# Altium PCB Nano_1.PcbDoc
Units mil, origin at the board's own origin, x right, y up, seen from the top; angles counter-clockwise.
Board outline 3887.5 x 2125 mil, 2 copper layers (Top Layer, Bottom Layer); 52 components, 35 nets, 149 pads, 2 vias.
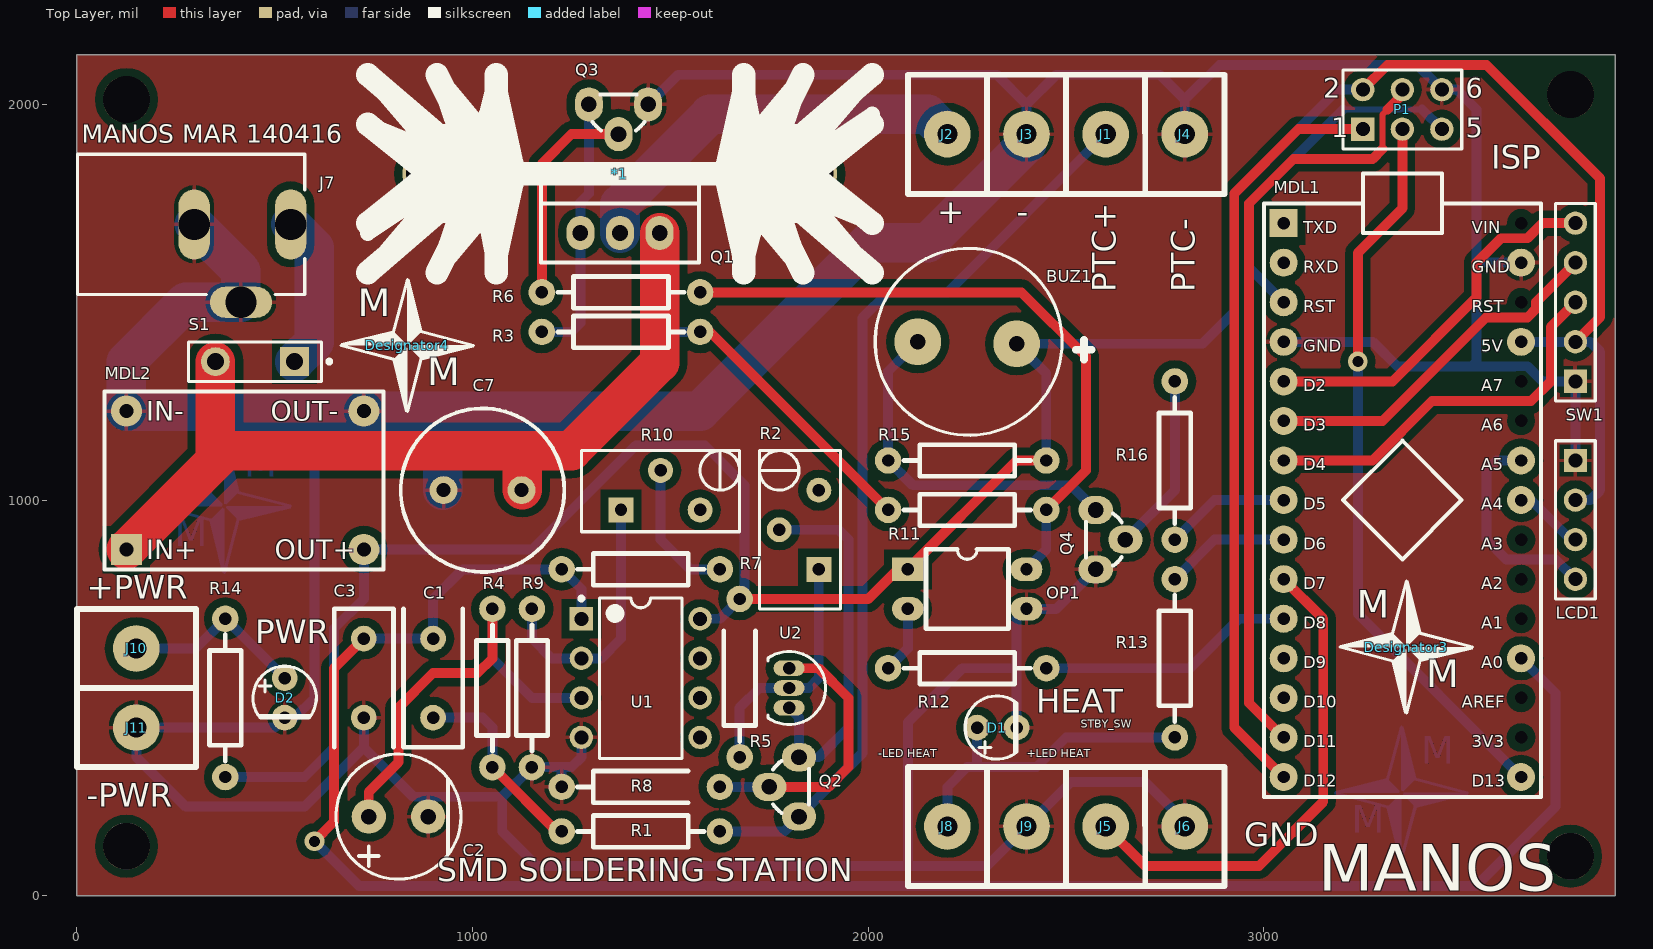
[diagram p0: Top Layer view]
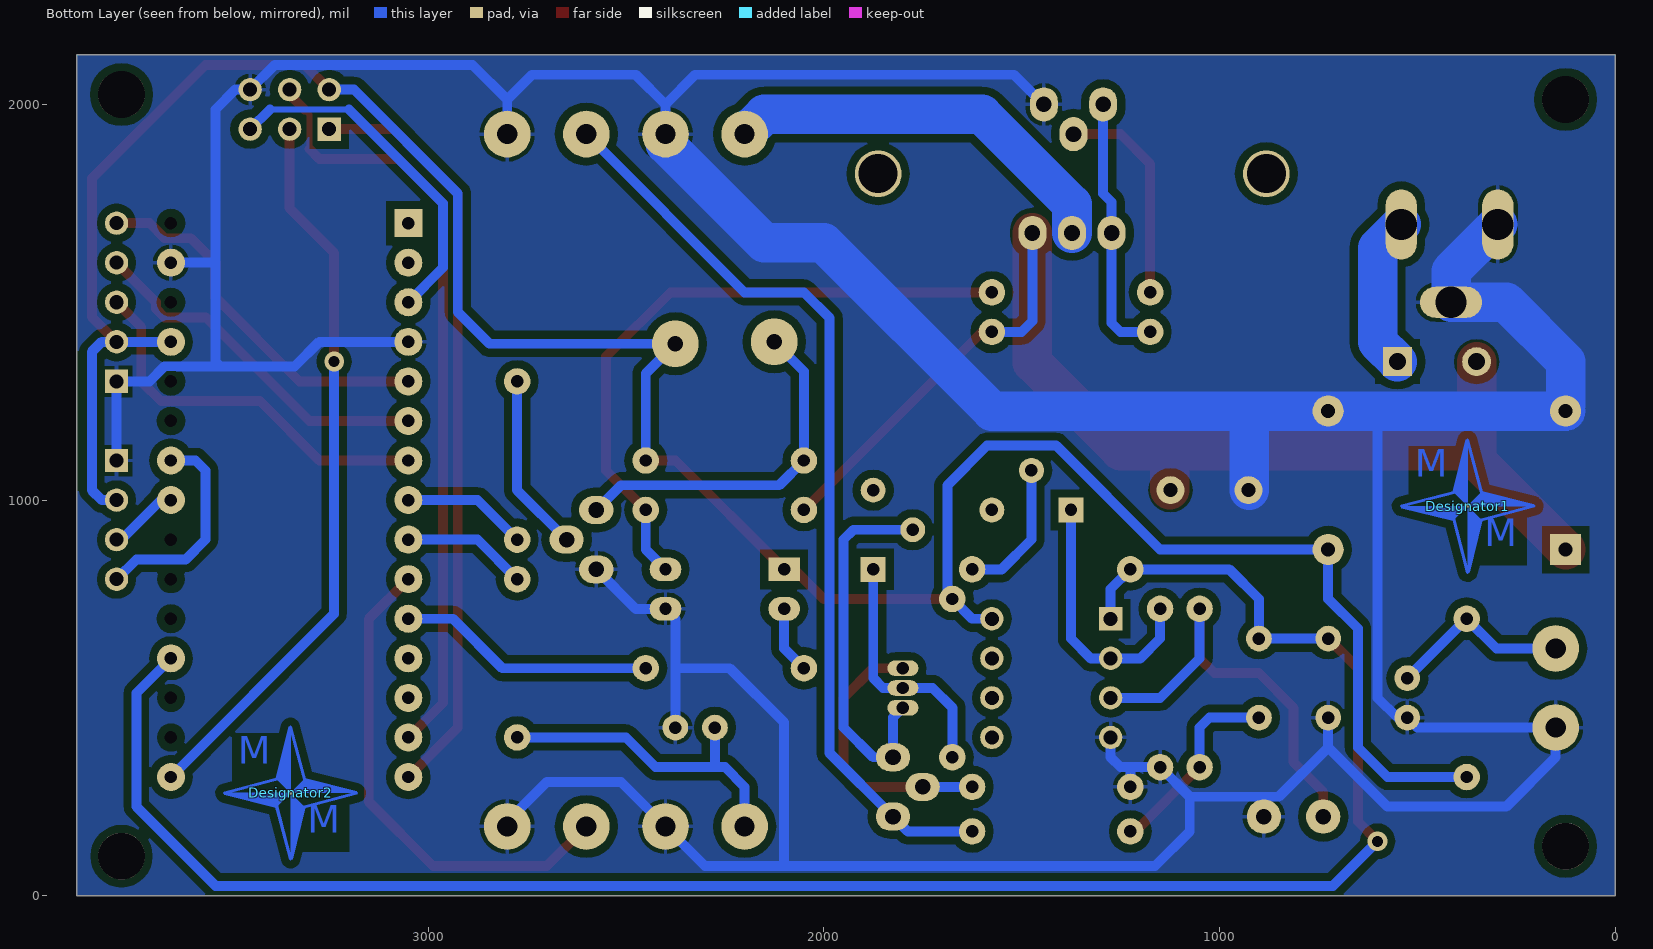
[diagram p1: Bottom Layer view, seen from below]

## Layer stack, top to bottom
Top Solder: solder mask 0.4, Solder Resist, Dk 3.5
Top Layer: signal copper 1.4
Dielectric 1: dielectric 12.6, FR-4, Dk 4.8
Bottom Layer: signal copper 1.4
Bottom Solder: solder mask 0.4, Solder Resist, Dk 3.5

## Board outline
0,0 3887.5,0 3887.5,2125 0,2125

## Design rules (kind name [scope] priority, off if disabled: settings)
Clearance [All] p1: gap=10
ComponentClearance [All] p1 off: gap=10 collisioncheckmode=3 verticalgap=10 showdistances=FALSE
PolygonConnect [All] p1: connectstyle=Relief reliefconductorwidth=10 reliefentries=4 polygonreliefangle="90 Angle" airgapwidth=10
RoutingVias [All] p1: holewidth=28 width=50 viastyle="Through Hole" minholewidth=28 minwidth=50 maxholewidth=28 maxwidth=50
SolderMaskExpansion [All] p1: expansion=4
UnpouredPolygon [All] p1: allowunpoured=FALSE
Width [All] p1: maxlimit=500 minlimit=10 preferedwidth=25 minimp=50.000000 maximp=50.000000 favimp=50.000000
28 further rules are at their usual default settings.

## Classes and differential pairs
component class Nano_1: *1 BUZ1 C1 C2 C3 C7 D1 D2 J1 J2 J3 J4 J5 J6 J7 J8 J9 J10 J11 LCD1 MDL1 MDL2 OP1 P1 Q1 Q2 Q3 Q4 R1 R2 R3 R4 R5 R6 R7 R8 R9 R10 R11 R12 R13 R14 R15 R16 S1 SW1 U1 U2

## Components (designator, comment, footprint, x,y, rotation, side; value= is the part's Value field where it differs from the comment)
*1 "HEAT-S1" "SK 104 HEATSHINK" 1360,1825 r180 top
BUZ1 "BUZZER" BUZZER 2125,1400 r0 top
C1 "47nF" RAD0.2 900,650 r270 top
C2 "10uF/25V" RB-08 737.5,200 r180 top
C3 "10nF" RAD0.2 725,450 r90 top
C7 "2200uF/35V" RB5-10.5 1025,1025 r180 top
D1 "HEAT" LED0.3 2325,425 r180 top
D2 "PWR" LED0.3 525,500 r90 top
Designator1 "Comment" LOGO_Bottom_Layer 372.59,984.65 r0 top
Designator2 "Comment" LOGO_Bottom_Layer 3347.59,259.65 r0 top
Designator3 "Comment" LOGO_Top_Overlay 3360.09,628.4 r0 top
Designator4 "Comment" LOGO_Top_Overlay 835.09,1390.9 r0 top
J1 "PTC+" CON2 2600,1925 r0 top
J2 "+" CON2 2200,1925 r0 top
J3 "-" CON2 2400,1925 r0 top
J4 "PTC-" CON2 2800,1925 r0 top
J5 "STBY_SW" CON2 2600,175 r0 top
J6 "GND" CON2 2800,175 r0 top
J7 "PWR2.5" "POWER JACK" 375,1500 r0 top
J8 "-LED HEAT" CON2 2200,175 r0 top
J9 "+LED HEAT" CON2 2400,175 r0 top
J10 "+PWR" CON2 150,625 r90 top
J11 "-PWR" CON2 150,425 r90 top
LCD1 "LCD 4x20 SERIAL" HDR1X4 3787.5,1100 r270 top
MDL1 "ARDUINO NANO" "ARDUINO NANO" 3050,300 r0 top
MDL2 "STEP DOWN CONVERTER" "STEP DOWN CONVERTER MINI" 125,1225 r0 top
OP1 "PC814" DIP-4 2250,775 r270 top
P1 "ISP" HDR2X3 3250,1937.5 r0 top
Q1 "IRF9530" TO-220V 1272.5,1675 r0 top
Q2 "BC557" T0-92 1750,275 r270 top
Q3 "BS170" T0-92 1368.75,1925 r0 top
Q4 "BC547" T0-92 2650,900 r90 top
R1 "10K" AXIAL0.4 1425,162.5 r180 top
R2 "5K" VR6 1875,925 r90 top
R3 "10K" AXIAL0.4 1375,1425 r0 top
R4 "15K" AXIAL0.4 1050,525 r90 top
R5 "1K" AXIAL0.4 1675,550 r90 top
R6 "220R" AXIAL0.4 1375,1525 r180 top
R7 "220K" AXIAL0.4 1425,825 r0 top
R8 "120K" AXIAL0.4 1425,275 r0 top
R9 "10K" AXIAL0.4 1150,525 r270 top
R10 "100K" VR6 1475,975 r0 top
R11 "2K2" AXIAL0.4 2250,975 r0 top
R12 "330R" AXIAL0.4 2250,575 r0 top
R13 "1K" AXIAL0.4 2775,600 r270 top
R14 "1K" AXIAL0.4 375,500 r270 top
R15 "1K" AXIAL0.4 2250,1100 r0 top
R16 "4K7" AXIAL0.4 2775,1100 r90 top
S1 "SW-SPST" SPST-2 450,1350 r180 top
SW1 "ENCODER" HDR1X5 3787.5,1300 r90 top
U1 "LT1013" DIP-8 1425,550 r0 top
U2 "LM336" Z03A 1800,525 r180 top

## Footprints (in the part's own frame and the unit in brackets; to place one, negate y for a bottom-side part, rotate by r counter-clockwise, add the part's x,y. Pads: shape width x height; smd on the part's side, far side on the other; paste and mask are expansions set on the pad)
"ARDUINO NANO" [mm]
  rect 1.8x1.8 hole 0.8: 1(0,35.56)
  round 1.8 hole 0.8: 2(0,33.02) 3(0,30.48) 4(0,27.94) 5(0,25.4) 6(0,22.86) 7(0,20.32) 8(0,17.78) 9(0,15.24) 10(0,12.7) 11(0,10.16) 12(0,7.62) 13(0,5.08) 14(0,2.54) 15(0,0) 16(15.24,0) 19(15.24,7.62) 23(15.24,17.78) 24(15.24,20.32) 27(15.24,27.94) 29(15.24,33.02)
  round 0 hole 0.8: 17(15.24,2.54) 18(15.24,5.08) 20(15.24,10.16) 21(15.24,12.7) 22(15.24,15.24) 25(15.24,22.86) 26(15.24,25.4) 28(15.24,30.48) 30(15.24,35.56)
  silkscreen extent -1.27,-1.27 16.51,38.73
AXIAL0.4 [mm]
  round 1.7 hole 0.8: 1(-5.08,0) 2(5.08,0)
  silkscreen extent -4.06,-1.02 4.06,1.02
BUZZER [mm]
  round 3 hole 1: 1(6.35,-0.127) 2(0,0)
  silkscreen extent -2.73,-6 11.18,6
CON2 [mm]
  round 3 hole 1.3: 1(0,0)
  silkscreen extent -2.54,-3.83 2.54,3.81
DIP-4 [mil]
  rect 60x80 hole 31.5: 1(-50,-150)
  oval 60x80 hole 31.5: 2(50,-150) 3(50,150) 4(-50,150)
  silkscreen extent -100,-104 100,104
DIP-8 [mm] "DIP; 8 Leads; Row Spacing 7.62 mm; Pitch 2.54 mm"
  rect 1.5x1.5 hole 0.9: 1(-3.81,3.81)
  round 1.5 hole 0.9: 2(-3.81,1.27) 3(-3.81,-1.27) 4(-3.81,-3.81) 5(3.81,-3.81) 6(3.81,-1.27) 7(3.81,1.27) 8(3.81,3.81)
  silkscreen extent -3.93,-5.15 2.65,5.23
HDR1X4 [mm] "Connector; Header; 4 Position"
  rect 1.5x1.5 hole 0.9: 1(0,0)
  round 1.5 hole 0.9: 2(2.54,0) 3(5.08,0) 4(7.62,0)
  silkscreen extent -1.27,-1.27 8.89,1.27
HDR1X5 [mm] "Connector; Header; 5 Position"
  rect 1.5x1.5 hole 0.9: 1(0,0)
  round 1.5 hole 0.9: 2(2.54,0) 3(5.08,0) 4(7.62,0) 5(10.16,0)
  silkscreen extent -1.27,-1.27 11.43,1.27
HDR2X3 [mm] "Connector; Header; 3x2 Position"
  rect 1.5x1.5 hole 0.9: 1(0,0)
  round 1.5 hole 0.9: 2(0,2.54) 3(2.54,0) 4(2.54,2.54) 5(5.08,0) 6(5.08,2.54)
  silkscreen extent -1.27,-1.27 6.35,3.81
LED0.3 [mil] "LED 3MM"
  round 65 hole 31.5: 1(50,0) 2(-50,0)
  silkscreen extent -51,-80 80,80
LOGO_Bottom_Layer [mm]
  rect 0.2x0.2 smd far side: 0(0,0)
  Bottom Layer region: -0.953,0.953 -0.117,0.117 -0.166,0 -4.243,0 -4.258,0.126
  Bottom Layer region: 0.953,-0.953 0.117,-0.117 0.166,0 4.243,0 4.258,-0.126
  Bottom Layer region: -0.953,-0.953 -0.117,-0.117 0,-0.166 0,-4.243 -0.126,-4.258
  Bottom Layer region: 0.953,0.953 0.117,0.117 0,0.166 0,4.243 0.126,4.258
  Bottom Layer lines w0.2: -4.243,0 -0.635,-0.953 ; -0.953,0.635 0,4.243 ; 0,-4.243 0.953,-0.635 ; 0.635,0.953 4.243,0
LOGO_Top_Overlay [mm]
  rect 0.2x0.2 on Top Overlay: 0(0,0)
  silkscreen extent -4.26,-4.26 4.26,4.26
"POWER JACK" [mm]
  oval 2x4.5 hole 2: 1(4.2,5) 2(-2,5)
  oval 4x2 hole 2: 3(1,0)
  silkscreen extent -9.5,0.5 5.1,9.5
RAD0.2 [mil]
  round 65 hole 31.5: 1(0,0) 2(200,0)
  silkscreen extent -75,-75 275,75
RB5-10.5 [mm] "Capacitor (Radial); 2 Leads"
  round 1.8 hole 0.9: 1(-2.5,0) 2(2.5,0)
  silkscreen extent -5.25,-5.25 5.25,5.25
RB-08 [mm]
  round 2.2 hole 1: 1(0,0) 2(-3.81,0)
  silkscreen extent -5.92,-4.02 2.11,4.02
"SK 104 HEATSHINK" [mm]
  round 3 hole 2.5: 0(-12.763,0) 0(12.16,0)
  silkscreen extent -16.51,-6.35 15.88,6.35
SPST-2 [mm] "Switch; 2 Leads"
  rect 1.85x1.85 hole 1.1: 1(-2.54,0)
  round 1.85 hole 1.1: 2(2.54,0)
  silkscreen extent -4.89,-1.27 4.28,1.27
"STEP DOWN CONVERTER MINI" [mm]
  rect 2x2 hole 0.9: 1(0,-8.89)
  round 2 hole 0.9: 2(0,0) 3(15.24,0) 4(15.24,-8.89)
  silkscreen extent -1.4,-10.16 16.51,1.27
T0-92 [mm]
  oval 1.8x2.2 hole 1: 1(0,0) 2(-1.905,1.905) 3(1.905,1.905)
  silkscreen extent -1.67,0.23 1.67,2.54
TO-220V [mm]
  oval 1.8x2.2 hole 1: 1(0,0) 2(2.54,0) 3(5.08,0)
  silkscreen extent -2.54,-1.91 7.62,3.17
VR6 [mm]
  rect 1.6x1.6 hole 0.8: 1(-2.54,0)
  round 1.6 hole 0.8: 2(0,2.54) 3(2.54,0)
  silkscreen extent -5.08,-1.4 5.08,3.81
Z03A [mm] "TO, Flat Index; 3 In-Line, Axial Leads; Body Dia. 4.6mm; Leads 0.53 x 0.39 mm (max)"
  oval 2x1 hole 0.8: 1(0,1.27) 2(0,0) 3(0,-1.27)
  silkscreen extent -2.34,-2.34 1.35,2.34

## Part data
C1 C3: library part D-101-0085, "Capacitor, Ceramic, 4.7uF 10% 16V 0805 (2012) X7R"
C2 C7: library part "Cap Pol1", "Polarized Capacitor (Radial)"
D1 D2: library part LED0, "Typical INFRARED GaAs LED"
J1 J2 J3 J4 J5 J6 J8 J9 J10 J11: library part CON1_S
J7: "Low Voltage Power Supply Connector"
LCD1: library part LCD4X20
OP1: library part OPTO-AC1, "AC OPTOCUPLER"
P1: library part "Header 3X2", "Header, 3-Pin, Dual row"
Q1: library part PMOS-2, "P-Channel Power MOSFET"
Q2: library part PNP, "PNP Bipolar Transistor"
Q3: library part NMOS-2, "N-Channel Power MOSFET"
Q4: library part NPN, "NPN Bipolar Transistor"
R1 R4 R5 R7 R8 R9 R11 R12 R15 R16: library part RES
R2 R10: library part RPot2
R3 R6 R13 R14: library part Res2, "Resistor"
S1: "Single-Pole, Single-Throw Switch"
SW1: library part "ROTARY ENC"
U1: library part LT1013ACJ8, "Dual Precision Operational Amplifier"
U2: library part LM385Z, "Adjustable Micropower Voltage Reference"

## Free pads (board coordinates)
  round 118.11 hole 118.11: 31(125,2012.5) 32(125,125) 33(3775,100) 34(3775,2025)

## Via types
v1: diameter 50, hole 28, Top Layer to Bottom Layer, 2 vias

## Nets (pads, with @x,y where several pads share a name; then routed paths per layer and width w, separated by ;. In a path a pad name is that pad's centre, name@x,y a point inside that pad or via, vN(x,y) a via of type N, cw(c..) or ccw(c..) an arc to the next point about the centre after c; other vN are vias at no path point)
+5V: BUZ1.1 LCD1.2 MDL1.27 MDL2.4 OP1.1 P1.2 R5.2 R14.2 R15.2 SW1.2 U1.8 | length 6742.7
  Top Layer w25: R5.2 2000,750 2075,825 OP1.1 2375,1100 R15.2 ; P1.2 3312.5,2100 3562.5,2100 3850,1812.5 3850,1462.5 SW1.2
  Bottom Layer w25: R14.2 575,300 650,375 650,675 725,750 MDL2.4 1150,875 1412.5,1137.5 1587.5,1137.5 1687.5,1037.5 1687.5,762.5 R5.2 1625,700 U1.8 ; R15.2 2450,1320 BUZ1.1 2845,1395 2925,1475 2925,1775 3187.5,2037.5 P1.2 ; MDL1.27 SW1.2 3825,1400 3850,1375 3850,1025 3825,1000 LCD1.2
+IN: C7.1 MDL2.1 Q1.3 R3.2 R11.1 S1.2 | length 3216.9
  Top Layer w25: R3.2 1600,1425 R11.1
  Top Layer w100: MDL2.1 375,1125 1125,1125 ; 350,1100 S1.2 ; C7.1@1125,1026.58 1125,1125 ; Q1.3 1472.5,1347.5 1250,1125 1125,1125
  Bottom Layer w25: Q1.3 1472.5,1452.5 1500,1425 R3.2
BUZZER_PIN: MDL1.8 R16.1 | length 316.4
  Bottom Layer w25: R16.1 2875,1000 MDL1.8
ENCODER1CHNA: MDL1.6 SW1.4 | length 912.9
  Top Layer w25: MDL1.6 3300,1200 3561.75,1461.75 3665.84,1461.75 3688.25,1484.16 3688.25,1500.75 SW1.4
ENCODER1CHNB: MDL1.5 SW1.5 | length 954.4
  Top Layer w25: MDL1.5 3325,1300 3537.5,1512.5 3537.5,1600 3599.25,1661.75 3665.84,1661.75 3704.09,1700 SW1.5
ENCODERDETENT: MDL1.7 SW1.3 | length 983.7
  Top Layer w25: MDL1.7 3275,1100 3425,1250 3675,1250 3725,1300 3725,1437.5 SW1.3
GND: C2.2 C3.1 C7.2 D1.2 D2.2 J3.1 J4.1 J6.1 J7.2 J7.3 J9.1 J11.1 LCD1.1 MDL1.4 MDL1.29 MDL2.2 MDL2.3 OP1.3 P1.6 Q3.3 Q4.2 R8.1 R9.2 SW1.1 U1.4 | length 13757.4
  Bottom Layer w25: 600,1225 600,500 550,450 D2.2 500,425 J11.1 150,350 275,225 575,225 725,375 ; C3.1 725,375 ; C2.2 887.5,250 ; R8.1 1225,325 ; U1.4 1275,350 1250,325 1225,325 ; Q3.3 1518.75,2075 2325,2075 2400,2000 ; D1.2 2375,575 ; J3.1 2400,2000 ; Q4.2 2475,725 OP1.3 2375,700 2375,575 ; J6.1 2800,187.5 2700,287.5 2512.5,287.5 J9.1 2300,75 2100,75 ; J4.1 2800,2012.5 ; MDL1.4 3275,1400 3337.5,1337.5 3525,1337.5 ; MDL1.29 3537.5,1600 ; LCD1.1 SW1.1 3704.09,1300 3665.84,1338.25 3634.16,1338.25 3633.41,1337.5 3525,1337.5 ; 725,375 850,250 887.5,250 ; 887.5,250 1075,250 ; 1075,250 1075,162.5 1162.5,75 2100,75 ; 1075,250 R9.2 1225,325 ; 2100,75 2100,437.5 2237.5,575 2375,575 ; 2400,2000 2475,2075 2737.5,2075 2800,2012.5 ; 2800,2012.5 2887.5,2100 3387.5,2100 P1.6 3487.5,2037.5 3537.5,1987.5 3537.5,1600 ; 3525,1337.5 3537.5,1350 3537.5,1600
  Bottom Layer w100: J7.2 414.37,1578.74 J7.3 275,1500 125,1350 MDL2.2 600,1225 MDL2.3 925,1225 ; C7.2@925,1025 925,1225 ; J3.1 2400,1900 2150,1650 2000,1650 1575,1225 925,1225
HEAT_LED: MDL1.9 R13.1 | length 316.4
  Bottom Layer w25: R13.1 2875,900 MDL1.9
MISO: MDL1.15 P1.1 | length 1919.1
  Top Layer w25: MDL1.15 2925,425 2925,1775 3087.5,1937.5 P1.1
MOSI: MDL1.14 P1.4 | length 1951.4
  Top Layer w15: 3300,1887.5 3300,1975 3312.5,1987.5
  Top Layer w25: MDL1.14 2962.5,487.5 2962.5,1750 3075,1862.5 3275,1862.5 3300,1887.5 ; 3312.5,1987.5 3350,2025 P1.4
NetBUZ1_2: BUZ1.2 Q4.3 R15.1 | length 907.8
  Bottom Layer w25: BUZ1.2 2050,1325 R15.1 2112.5,1037.5 2512.5,1037.5 Q4.3
NetC1_2: C1.2 R1.2 R4.1 | length 502.7
  Top Layer w25: R4.1 1212.5,162.5 R1.2
  Bottom Layer w25: C1.2 1025,450 1050,425 R4.1
NetC2_1: C2.1 R4.2 U1.3 | length 1111.8
  Top Layer w25: C2.1 737.5,262.5 812.5,337.5 812.5,475 900,562.5 1012.5,562.5 1050,600 R4.2
  Bottom Layer w25: R4.2 1050,600 1150,500 U1.3
NetD1_1: D1.1 J8.1 R13.2 | length 826.8
  Bottom Layer w25: J8.1 2200,275 2250,325 2275,325 ; D1.1 2275,325 ; R13.2 2500,400 2425,325 2275,325
NetD2_1: D2.1 J10.1 R14.1 | length 468.2
  Bottom Layer w25: J10.1 300,625 R14.1 D2.1
NetJ1_1: J1.1 Q2.3 R1.1 | length 2349.4
  Bottom Layer w25: R1.1 1787.5,162.5 Q2.3 1985,360 1985,1460 2050,1525 2200,1525 J1.1
NetJ2_1: J2.1 Q1.2 | length 1014.9
  Bottom Layer w100: Q1.2 1372.5,1747.5 1600,1975 2150,1975 J2.1
NetJ7_1: J7.1 S1.1 | length 392.3
  Bottom Layer w100: J7.1 600,1637.21 600,1400 S1.1
NetOP1_2: OP1.2 R12.1 | length 170.7
  Bottom Layer w25: R12.1 2100,625 OP1.2
NetQ1_1: Q1.1 Q3.2 R3.1 | length 668.1
  Bottom Layer w25: R3.1 1250,1425 1272.5,1447.5 Q1.1 1272.5,1753.75 1293.75,1775 Q3.2
NetQ2_1: Q2.1 R8.2 U2.3 | length 701.8
  Top Layer w25: Q2.1 1900,275 1950,325 1950,500 1875,575 U2.3
  Bottom Layer w25: R8.2 Q2.1
NetQ2_2: Q2.2 R2.2 U2.1 | length 951.8
  Bottom Layer w25: R2.2 1925,925 1950,900 1950,425 1875,350 Q2.2 1825,450 U2.1
NetQ3_1: Q3.1 R6.2 | length 549.8
  Top Layer w25: R6.2 1175,1850 1250,1925 Q3.1
NetQ4_1: Q4.1 R16.2 | length 451.8
  Bottom Layer w25: Q4.1 2775,1025 R16.2
NetR2_1: R2.1 R5.1 U2.2 | length 631.1
  Bottom Layer w25: R5.1 1675,475 1725,525 U2.2 1850,525 1875,550 R2.1
NetR7_2: R7.2 R10.2 | length 356.1
  Bottom Layer w25: R10.2 1475,900 1550,825 R7.2
NetR9_1: R9.1 R10.1 U1.2 | length 666.4
  Bottom Layer w25: R9.1 1150,650 1200,600 U1.2 1325,600 1375,650 R10.1
PWM_OUT: OP1.4 R6.1 R11.2 | length 1641.9
  Top Layer w25: R6.1 2387.5,1525 2550,1362.5 2550,1075 R11.2
  Bottom Layer w25: OP1.4 2450,875 R11.2
PWMPIN: MDL1.11 R12.2 | length 651.8
  Bottom Layer w25: R12.2 2812.5,575 2937.5,700 MDL1.11
RESET: MDL1.3 P1.5 | length 892.8
  Bottom Layer w15: 3200,1987.5 3400,1987.5
  Bottom Layer w25: MDL1.3 2962.5,1587.5 2962.5,1750 3200,1987.5 ; 3400,1987.5 P1.5
SCK: MDL1.16 P1.3 | length 1855
  Top Layer w25: v1(3237.5,1350) 3237.5,1625 3350,1737.5 P1.3
  Bottom Layer w25: v1(3237.5,1350) 3237.5,712.5 MDL1.16
SCL: LCD1.4 MDL1.24 | length 539.3
  Bottom Layer w25: MDL1.24 3587.5,1100 3562.5,1075 3562.5,900 3612.5,850 3737.5,850 LCD1.4
SDA: LCD1.3 MDL1.23 | length 178.9
  Bottom Layer w25: MDL1.23 3675,1000 3775,900 LCD1.3
STBYPIN: J5.1 MDL1.10 | length 1262.7
  Top Layer w25: J5.1 2700,75 2987.5,75 3150,237.5 3150,700 MDL1.10
TEMPPIN: C1.1 C3.2 MDL1.19 R7.1 U1.1 | length 5019.2
  Top Layer w25: v1(600,137.5) 650,187.5 650,575 C3.2
  Bottom Layer w25: v1(600,137.5) 712.5,25 3537.5,25 3737.5,225 3737.5,512.5 MDL1.19 ; C3.2 C1.1 900,750 975,825 R7.1 1275,775 U1.1
pads on no net: *1.0 Designator1.0 Designator2.0 Designator3.0 Designator4.0 MDL1.1 MDL1.2 MDL1.12 MDL1.13 MDL1.17 MDL1.18 MDL1.20 MDL1.21 MDL1.22 MDL1.25 MDL1.26 MDL1.28 MDL1.30 R2.3 R10.3 U1.5 U1.6 U1.7

## Polygon pours and split planes (outlines as drawn)
GND on Bottom Layer "Top Layer-No Net" (solid, remove dead copper, pour order 2): 0,2125 0,0 3887.5,0 3887.5,2125
GND on Top Layer "Top Layer-No Net" (solid, remove dead copper, pour order 4): 0,2125 0,0 3887.5,0 3887.5,2125

## Silkscreen, mask and mechanical layers (free items; w line width, h text height)
Top Overlay:
  text "MANOS MAR 140416" at 12.5,1887.5 h78.74
  text "SMD SOLDERING STATION" at 910.09,15.9 h100
  text "MANOS" at 3137.5,12.5 h118.11
Mechanical 1:
  the board outline again, w10

## Text inside footprints (layer, text, board x,y; h text height)
Designator1: Bottom Layer "M" at 422.59,1034.65 h120; Bottom Layer "M" at 247.59,859.65 h120
Designator2: Bottom Layer "M" at 3397.59,309.65 h120; Bottom Layer "M" at 3222.59,134.65 h120
Designator3: Top Overlay "M" at 3235.09,678.4 h120; Top Overlay "M" at 3410.09,503.4 h120
Designator4: Top Overlay "M" at 710.09,1440.9 h120; Top Overlay "M" at 885.09,1265.9 h120
MDL1: Top Overlay "VIN" at 3525,1675 h30; Top Overlay "GND" at 3525,1575 h30; Top Overlay "RST" at 3525,1475 h30; Top Overlay "5V" at 3550,1375 h30; Top Overlay "A7" at 3550,1275 h30; Top Overlay "A6" at 3550,1175 h30; Top Overlay "A5" at 3550,1075 h30; Top Overlay "A4" at 3550,975 h30; Top Overlay "A3" at 3550,875 h30; Top Overlay "A2" at 3550,775 h30; Top Overlay "A1" at 3550,675 h30; Top Overlay "A0" at 3550,575 h30; Top Overlay "AREF" at 3500,475 h30; Top Overlay "3V3" at 3525,375 h30; Top Overlay "D13" at 3525,275 h30; Top Overlay "D12" at 3100,275 h30; Top Overlay "D11" at 3100,375 h30; Top Overlay "D10" at 3100,475 h30; Top Overlay "D9" at 3100,575 h30; Top Overlay "D8" at 3100,675 h30; Top Overlay "D7" at 3100,775 h30; Top Overlay "D6" at 3100,875 h30; Top Overlay "D5" at 3100,975 h30; Top Overlay "D4" at 3100,1075 h30; Top Overlay "D3" at 3100,1175 h30; Top Overlay "D2" at 3100,1275 h30; Top Overlay "GND" at 3100,1375 h30; Top Overlay "RST" at 3100,1475 h30; Top Overlay "RXD" at 3100,1575 h30; Top Overlay "TXD" at 3100,1675 h30
MDL2: Top Overlay "OUT-" at 490,1200 h50; Top Overlay "OUT+" at 500,850 h50; Top Overlay "IN-" at 175,1200 h50; Top Overlay "IN+" at 175,850 h50
P1: Top Overlay "6" at 3510,2017.5 h50; Top Overlay "5" at 3510,1917.5 h50; Top Overlay "2" at 3150,2017.5 h50; Top Overlay "1" at 3170,1917.5 h50